# Altium PCB 6C-2L-1550um.PcbDoc
Units mm, origin at the board's own origin, x right, y up, seen from the top; angles counter-clockwise.
Board outline 14 x 48.25 mm, 2 copper layers (Top Layer, Bottom Layer), stack 1.586 mm thick; 4 components, 9 nets, 18 pads, 0 vias.
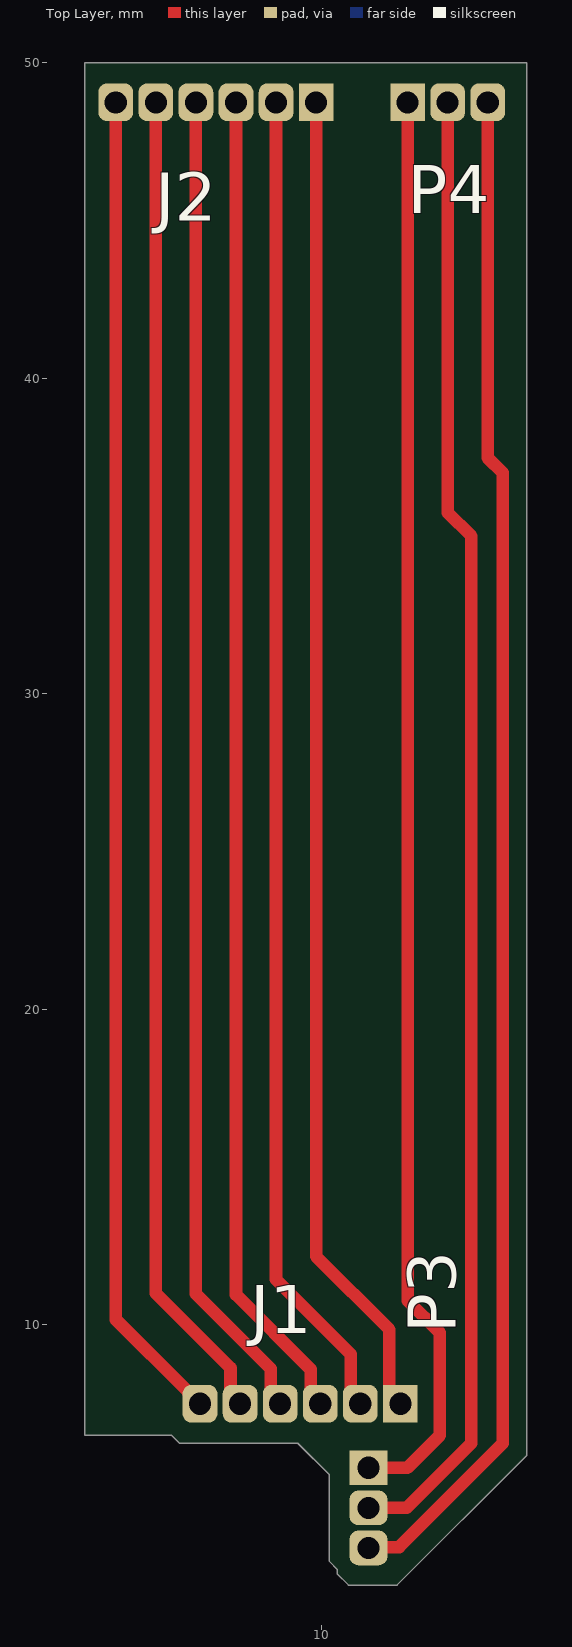
[diagram p0: Top Layer view]
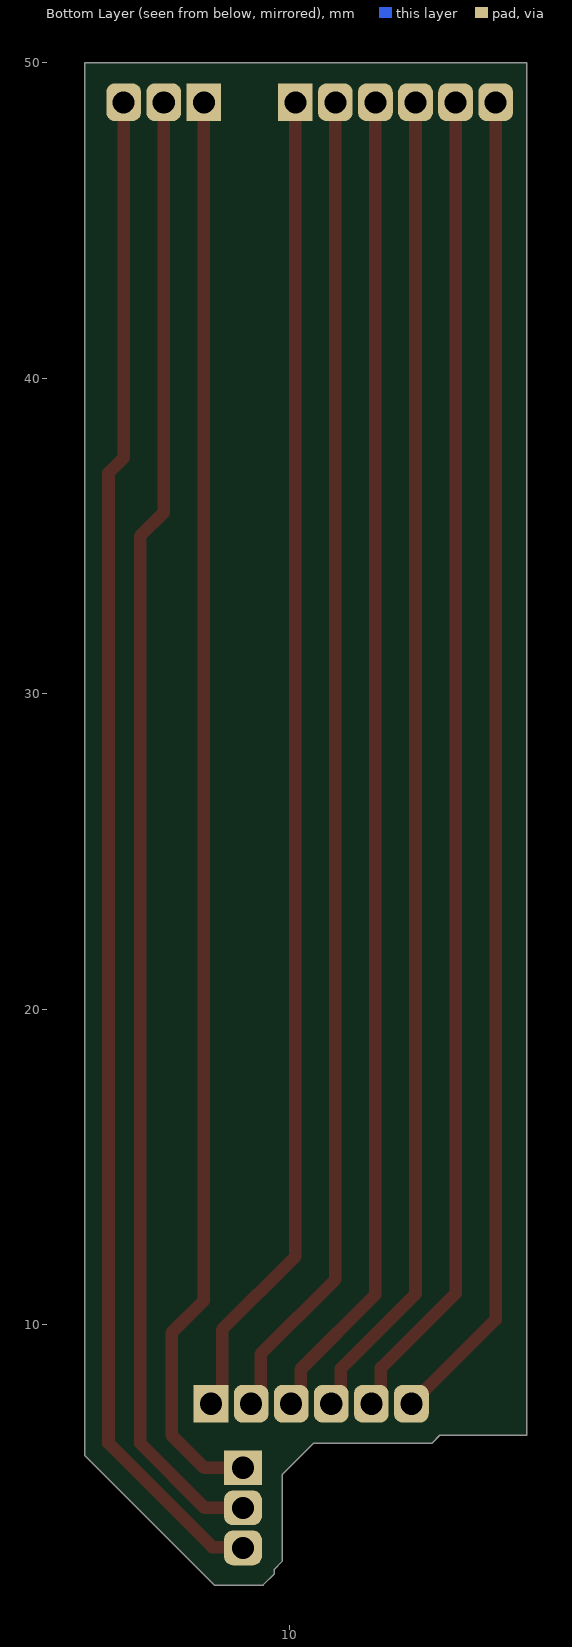
[diagram p1: Bottom Layer view, seen from below]

## Layer stack, top to bottom
Top Solder: solder mask 0.0102, Solder Resist, Dk 3.5
Top Layer: signal copper 0.018
Dielectric1: core 1.55, FR-4, Dk 4.8
Bottom Layer: signal copper 0.018
Bottom Solder: solder mask 0.0102, Solder Resist, Dk 3.5

## Board outline
5.5,6.25 9.25,6.25 10.25,5.25 10.25,2.5 10.5,2.25 10.5,2.104 10.854,1.75 12.396,1.75 16.5,5.854 16.5,50 2.5,50 2.5,6.5 5.25,6.5

## Design rules (kind name [scope] priority, off if disabled: settings)
BoardOutlineClearance [All] p1: gap=0.25 ignorepadtopadclearanceinfootprint=FALSE except(0: Arc-SplitContinuation Track-SplitContinuation SMDPad-SplitContinuation THPad-SplitContinuation Via-SplitContinuation Fill-SplitContinuation Poly-SplitContinuation Region-SplitContinuation Text-SplitContinuation)
Clearance Clearance-xPP-xTP-xTT [All] p1: gap=0.15 ignorepadtopadclearanceinfootprint=FALSE except(0: Arc-Hole Track-Hole SMDPad-Hole THPad-Hole Via-Hole Fill-Hole Poly-Hole Region-Hole Text-Hole)
ComponentClearance [All] p1: gap=0.25 collisioncheckmode=3 verticalgap=0.25 showdistances=FALSE
DiffPairsRouting [All] p1: maxlimit=0.25 minlimit=0.25 mostfreqgap=0.25 toplayer_minwidth=0.381 toplayer_maxwidth=0.381 toplayer_prefwidth=0.381 bottomlayer_minwidth=0.381 bottomlayer_maxwidth=0.381 bottomlayer_prefwidth=0.381 maxuncoupledlength=12.5
Height [All] p1: minheight=0 maxheight=25 prefheight=12.5
HoleSize HoleSize-PTH [All] p1: absolutevalues=TRUE maxlimit=2 minlimit=0.25 maxpercent=80.000 minpercent=20.000
HoleToHoleClearance [All] p1: gap=0.35 allowstackedmicrovias=TRUE
MinimumAnnularRing "Minimum IAR  >0.45mm" [((ObjectKind = 'Pad') OR (ObjectKind = 'Via')) And (Layer = 'MultiLayer') And (HoleDiameter > AsMM(0.45))] p1: minimumring=0.175 // minimum inner annular ring for pads > 0.45mm finished hole size
MinimumAnnularRing "Minimum IAR <=0.45mm" [((ObjectKind = 'Pad') OR (ObjectKind = 'Via')) And (Layer = 'MultiLayer') And (HoleDiameter <= AsMM(0.45))] p2: minimumring=0.175 // minimum inner annular ring for pads <= 0.45mm finished hole size
MinimumSolderMaskSliver [All] p1: minsoldermaskwidth=0.08
PlaneClearance PlaneClearance-IPI [All] p1: clearance=0.25
PlaneConnect [All] p1: planeconnectstyle=Relief reliefexpansion=0.175 reliefentries=4 reliefconductorwidth=0.2 reliefairgap=0.2
PolygonConnect PolygonConnect-xTW [All] p1: connectstyle=Direct reliefconductorwidth=0.2 reliefentries=4 polygonreliefangle="90 Angle" airgapwidth=0.2
RoutingCorners [All] p1: cornerstyle=45-Degree minsetback=2.5 maxsetback=2.5
RoutingVias "RoutingVias > 0.45mm" [(ObjectKind = 'Via') And (HoleDiameter > AsMM(0.45))] p1: holewidth=0.5 width=0.85 viastyle="Through Hole" minholewidth=0.5 minwidth=0.85 maxholewidth=0.9 maxwidth=1.25 // finishet hole size > 0.45mm
RoutingVias "RoutingVias <= 0.45mm" [(ObjectKind = 'Via') And (HoleDiameter <= AsMM(0.45))] p2: holewidth=0.3 width=0.65 viastyle="Through Hole" minholewidth=0.25 minwidth=0.6 maxholewidth=0.45 maxwidth=0.8 // finishet hole size <= 0.45mm
SilkToSilkClearance [All] p1: silktosilkclearance=0.2
SilkToSolderMaskClearance SilkscreenOverComponentPads [IsPad] p1: minsilkscreentomaskgap=0.2 clearancetoexposedcopper=TRUE
SolderMaskExpansion [All] p1: expansion=0 istentingtop=FALSE
UnRoutedNet [All] p1: checkbadconnections=TRUE
Width Width-xTW [All] p1: maxlimit=1.5 minlimit=0.15 preferedwidth=0.2
18 further rules are at their usual default settings.

## Components (designator, comment, footprint, x,y, rotation, side; value= is the part's Value field where it differs from the comment)
J1 "1x6 Header" "1x6 Header 1.27" 12.5,7.5 r180 top
J2 "1x6 Header" "1x6 Header 1.27" 9.83,48.75 r180 top
P3 "1x3 Header" "1x3 Header 1.27" 11.49,5.47 r270 top
P4 "1x3 Header" "1x3 Header 1.27" 12.73,48.75 r0 top

## Footprints (in the part's own frame and the unit in brackets; to place one, negate y for a bottom-side part, rotate by r counter-clockwise, add the part's x,y. Pads: shape width x height; smd on the part's side, far side on the other; paste and mask are expansions set on the pad)
"1x3 Header 1.27" [mm]
  rect 1.1x1.2 hole 0.7 paste+0 mask+0: 1(0,0)
  rrect50% 1.1x1.2 hole 0.7 paste+0 mask+0: 2(1.27,0) 3(2.54,0)
"1x6 Header 1.27" [mm]
  rect 1.1x1.2 hole 0.7 paste+0 mask+0: 1(0,0)
  rrect50% 1.1x1.2 hole 0.7 paste+0 mask+0: 2(1.27,0) 3(2.54,0) 4(3.81,0) 5(5.08,0) 6(6.35,0)

## Nets (pads, with @x,y where several pads share a name; then routed paths per layer and width w, separated by ;. In a path a pad name is that pad's centre, name@x,y a point inside that pad or via, vN(x,y) a via of type N, cw(c..) or ccw(c..) an arc to the next point about the centre after c; other vN are vias at no path point)
NetJ1_1: J1.1 J2.1 | length 42.4
  Top Layer w0.4: J2.1 9.83,12.17 12.15,9.85 12.15,7.85 J1.1
NetJ1_2: J1.2 J2.2 | length 42.4
  Top Layer w0.4: J2.2 8.56,11.44 10.926,9.074 10.926,7.804 J1.2
NetJ1_3: J1.3 J2.3 | length 42.4
  Top Layer w0.4: J2.3 7.29,10.96 9.656,8.594 9.656,7.804 J1.3
NetJ1_4: J1.4 J2.4 | length 42.4
  Top Layer w0.4: J2.4 6.02,10.98 8.386,8.614 8.386,7.804 J1.4
NetJ1_5: J1.5 J2.5 | length 42.4
  Top Layer w0.4: J2.5 4.75,11 7.116,8.634 7.116,7.804 J1.5
NetJ1_6: J1.6 J2.6 | length 42.4
  Top Layer w0.4: J2.6 3.48,10.17 5.75,7.9 5.759,7.9 6.15,7.509 J1.6
NetP3_1: P3.1 P4.1 | length 45.4
  Top Layer w0.4: P3.1 12.72,5.47 13.75,6.5 13.75,9.75 12.73,10.77 P4.1
NetP3_2: P3.2 P4.2 | length 46.9
  Top Layer w0.4: P3.2 12.7,4.2 14.75,6.25 14.75,35 14,35.75 P4.2
NetP3_3: P3.3 P4.3 | length 48.3
  Top Layer w0.4: P3.3 11.516,2.956 12.456,2.956 15.75,6.25 15.75,37 15.27,37.48 P4.3

## Silkscreen, mask and mechanical layers (free items; w line width, h text height)
Dimensions:
  lines w0.2: 2.5,6.5 2.5,40 2.5,50 16.5,50 16.5,40 16.5,9.75 16.5,5.854 12.396,1.75 12.25,1.75 10.854,1.75 10.5,2.104 10.5,2.25 10.25,2.5 10.25,5.25 9.25,6.25 5.5,6.25 5.25,6.5 2.5,6.5